# Altium PCB ECE453.PcbDoc
Units mm, origin at the board's own origin, x right, y up, seen from the top; angles counter-clockwise.
Board outline 100 x 100 mm, 2 copper layers (Top Layer, Bottom Layer); 32 components, 24 nets, 100 pads, 64 vias.
Unrouted connection lines stored in the file: 41.
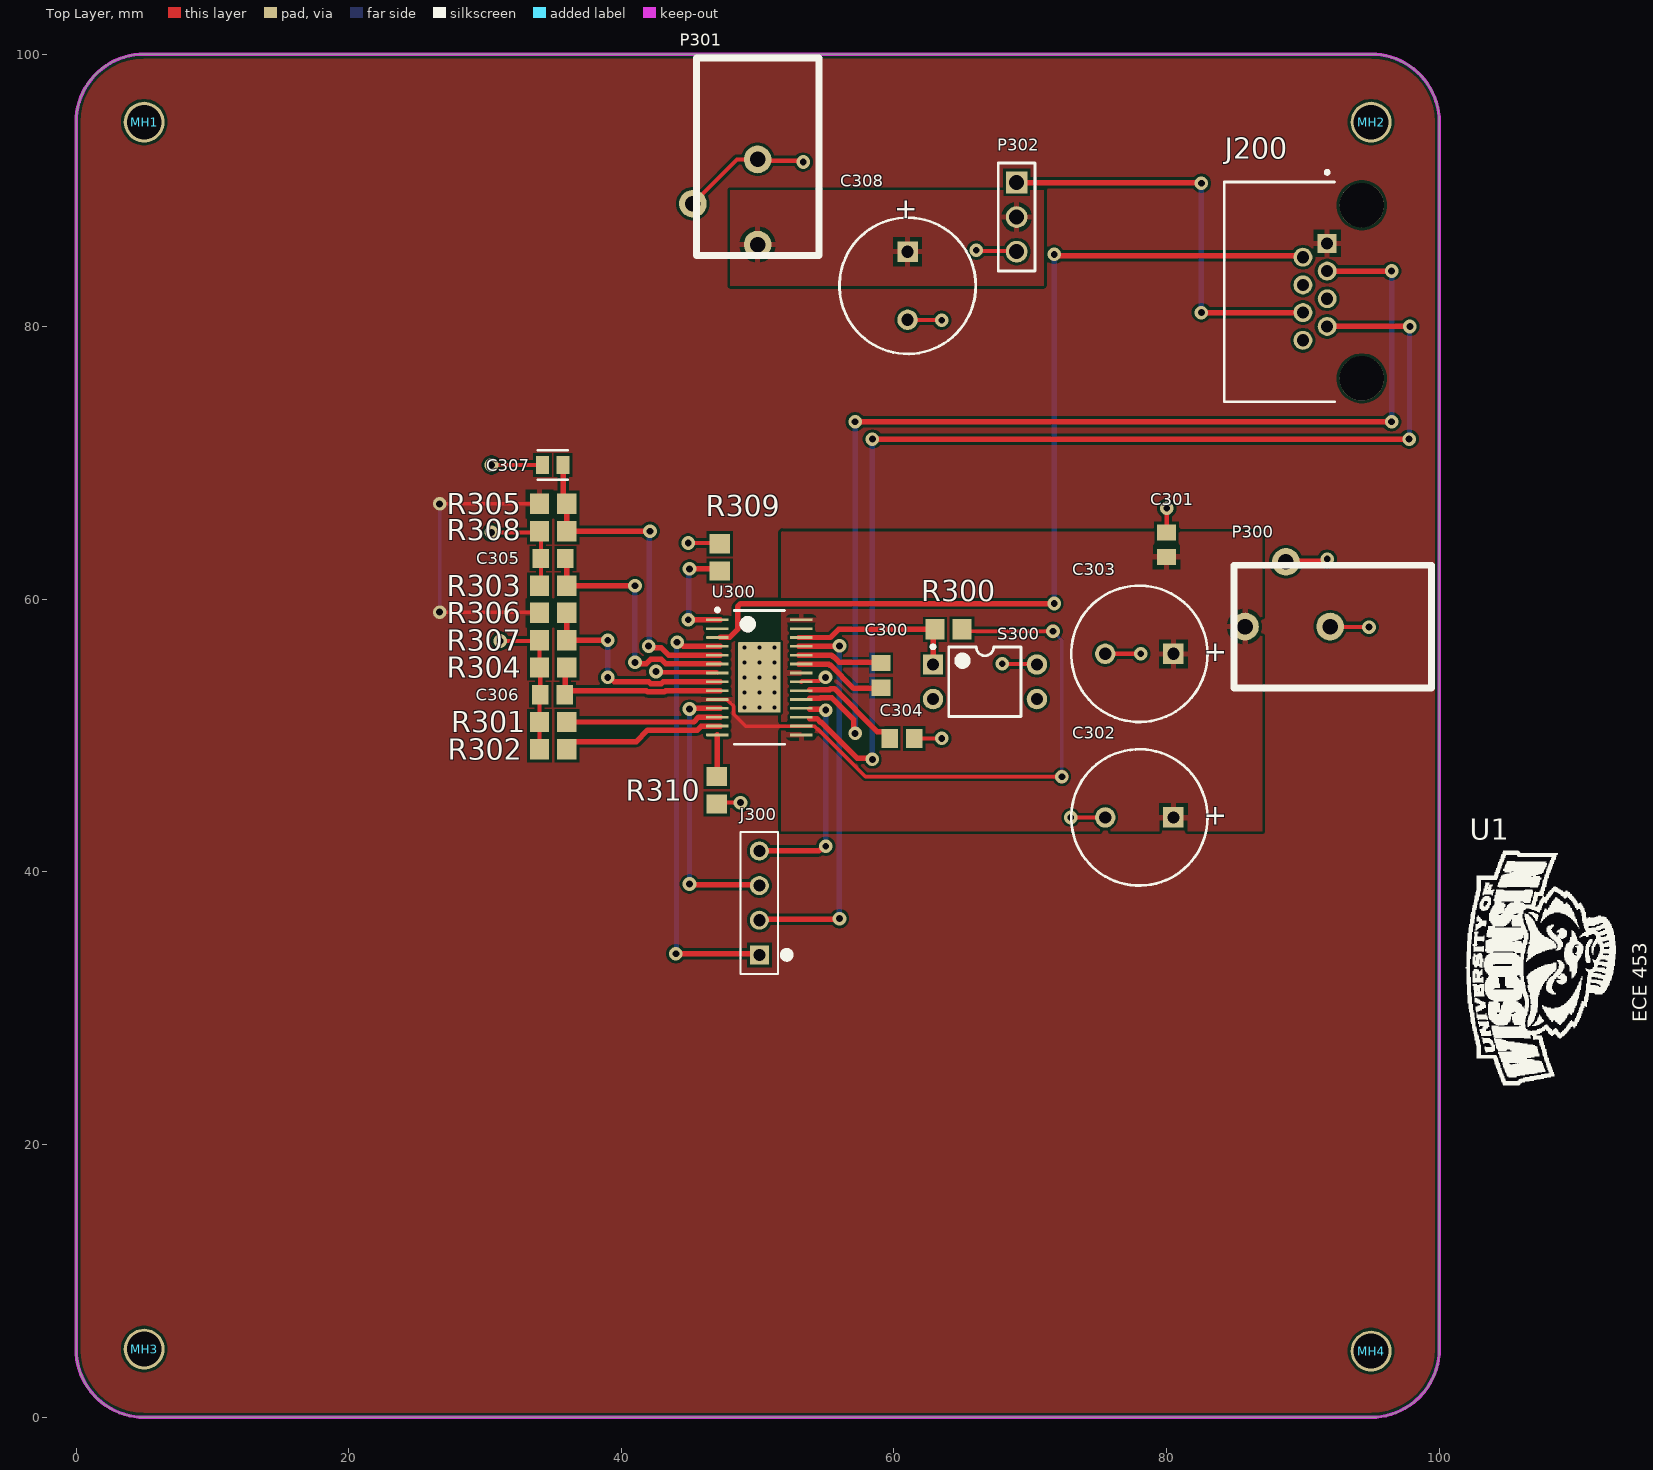
[diagram p0: Top Layer view]
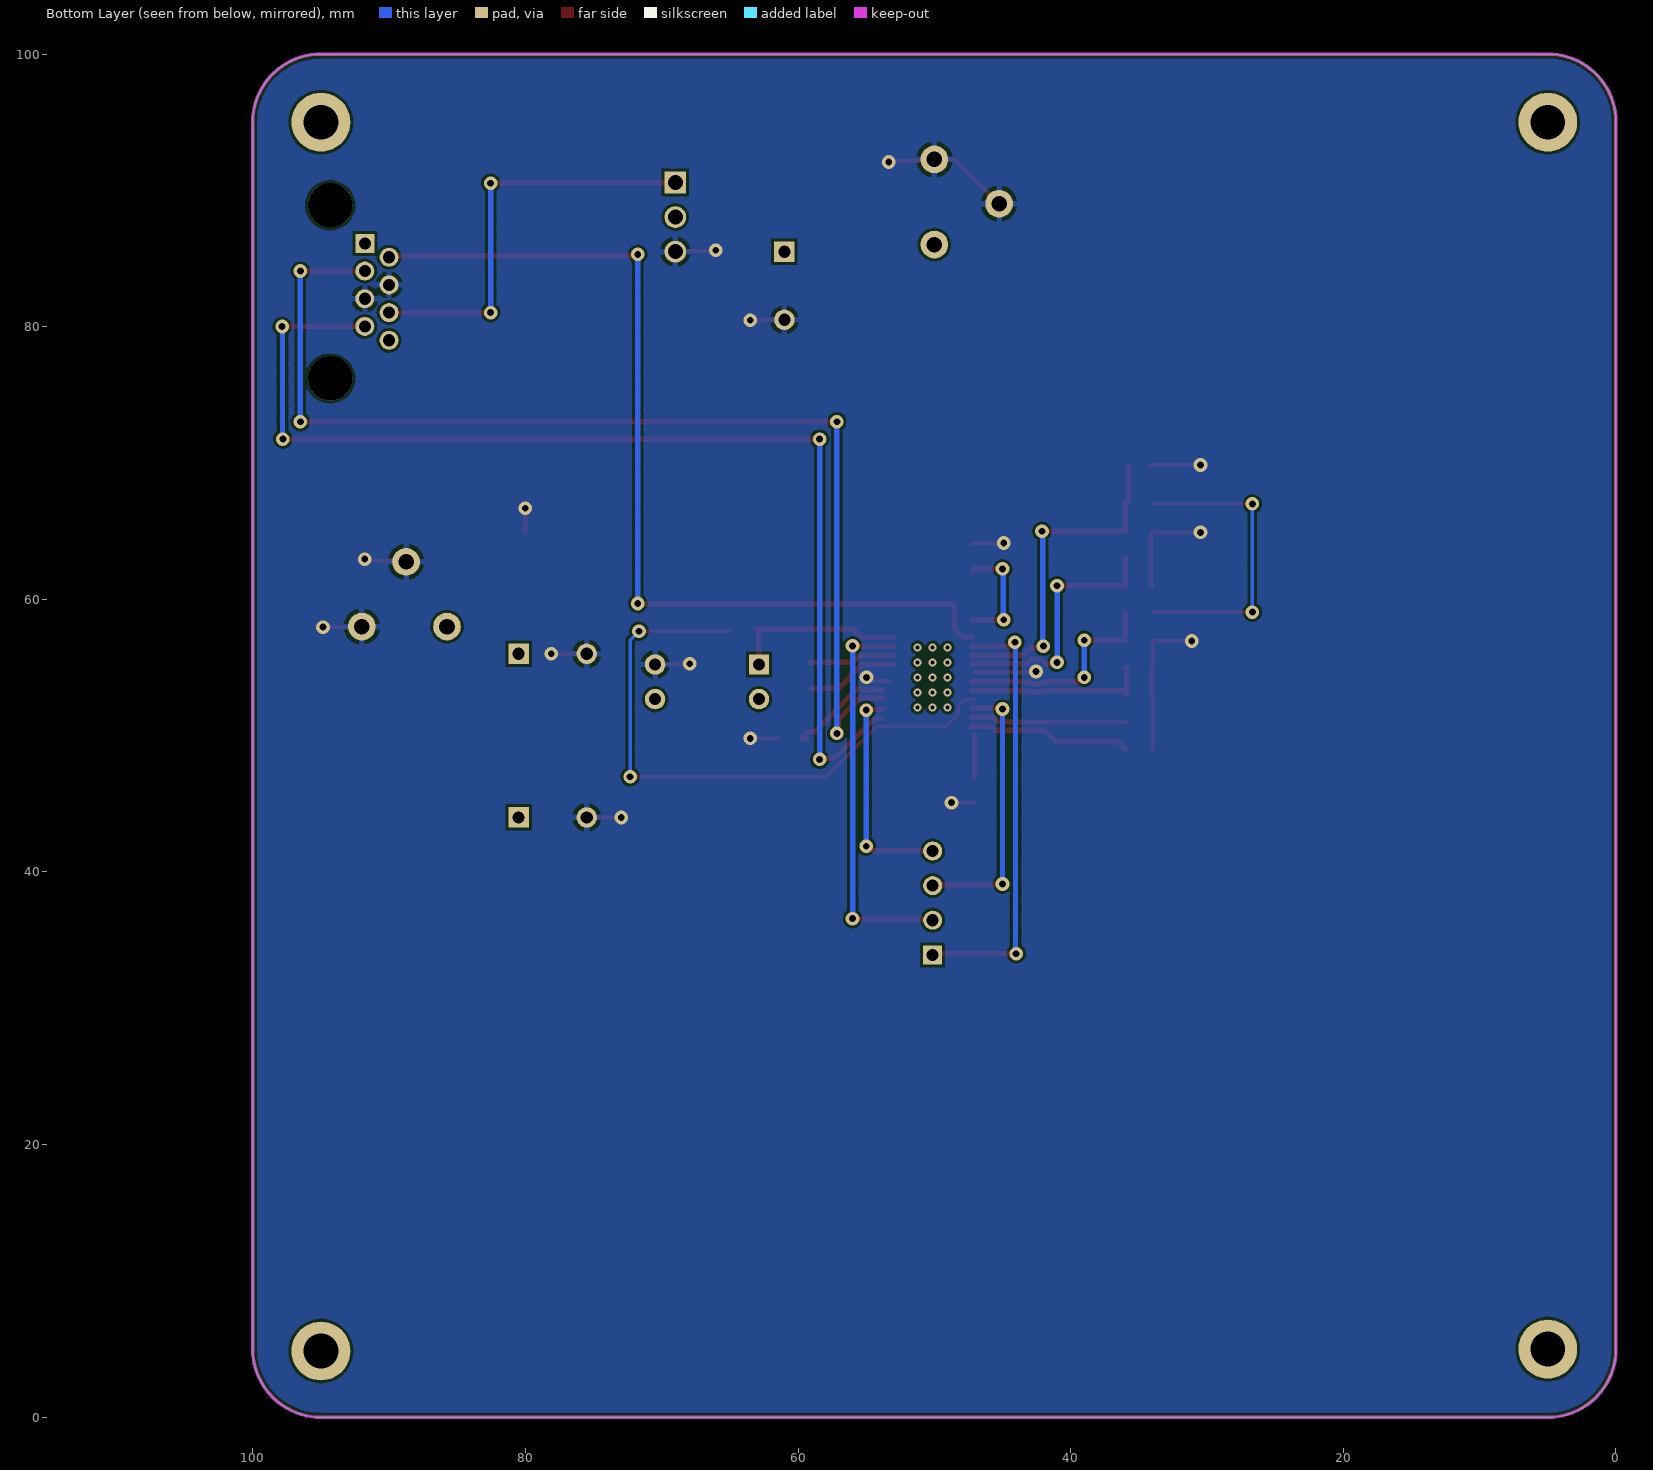
[diagram p1: Bottom Layer view, seen from below]

## Layer stack, top to bottom
Top Solder: solder mask 0.0102, Solder Resist, Dk 3.5
Top Layer: signal copper 0.0356
Dielectric1: dielectric 0.32, FR-4, Dk 4.8
Bottom Layer: signal copper 0.0356
Bottom Solder: solder mask 0.0102, Solder Resist, Dk 3.5

## Board outline
0,5 ccw(c5,5) 5,0 95,0 ccw(c95,5) 100,5 100,95 ccw(c95,95) 95,100 5,100 ccw(c5,95) 0,95

## Design rules (kind name [scope] priority, off if disabled: settings)
Clearance Polygon_Clearance [All vs InPolygon] p1: gap=0.2 ignorepadtopadclearanceinfootprint=FALSE
Clearance [All] p2: gap=0.2 ignorepadtopadclearanceinfootprint=TRUE
ComponentClearance [InComponent('U3')] p1: gap=0 collisioncheckmode=3 verticalgap=0.254 showdistances=FALSE
Height [All] p1: minheight=0 maxheight=75 prefheight=12.7
HoleSize [All] p1: absolutevalues=TRUE maxlimit=6.35 minlimit=0.3 maxpercent=80.000 minpercent=20.000
MinimumAnnularRing [All] p1: minimumring=0.15
MinimumSolderMaskSliver [All] p1: minsoldermaskwidth=0.22
NetAntennae NetAntennae_5.0V [InNet('5.0V')] p1: netantennaetolerance=0
NetAntennae NetAntennae_3.3V [InNet('3.3V')] p2: netantennaetolerance=0
PlaneClearance [All] p1: clearance=0.3
PlaneConnect [All] p1: planeconnectstyle=Relief reliefexpansion=0.3 reliefentries=4 reliefconductorwidth=0.3 reliefairgap=0.3
PolygonConnect ViaConnect [All vs IsVia] p1: connectstyle=Direct reliefconductorwidth=0.381 reliefentries=4 polygonreliefangle="90 Angle" airgapwidth=0.254
PolygonConnect [All] p2: connectstyle=Relief reliefconductorwidth=0.4 reliefentries=4 polygonreliefangle="90 Angle" airgapwidth=0.3
RoutingVias [All] p1: holewidth=0.3 width=0.6 viastyle="Through Hole" minholewidth=0.3 minwidth=0.6 maxholewidth=5 maxwidth=10
SilkToSilkClearance [All] p1: silktosilkclearance=0
SilkToSolderMaskClearance [IsPad] p1: minsilkscreentomaskgap=0 clearancetoexposedcopper=TRUE
SolderMaskExpansion [All] p1: expansion=0.102 istentingtop=FALSE
UnConnectedPin [All] p1 off:
Width [All] p1: maxlimit=10 minlimit=0.2 preferedwidth=0.6
21 further rules are at their usual default settings.

## Classes and differential pairs
component class 04_Mechanical: MH1 MH2 MH3 MH4 U1

## Components (designator, comment, footprint, x,y, rotation, side; value= is the part's Value field where it differs from the comment)
C300 "0.22uF" CAP_0805 59.055,54.424 r270 top
C301 "0.22uF" CAP_0805 80,64 r90 top
C302 "470uF" CAPPR5-10X12.5 78,44 r180 top
C303 "470uF" CAPPR5-10X12.5 78,56 r180 top
C304 "0.22uF" CAP_0805 60.59,49.781 r0 top
C305 "Cap" CAP_0805 35,63 r0 top value=1nF
C306 "Cap" CAP_0805 34.95,53 r0 top value=1nF
C307 "C0.1uF" FP-C0805C-DN-MFG 34.977,69.85 r180 top value="0.10 μF"
C308 "470uF" CAPPR5-10X12.5 61,83 r270 top
J200 "RJHSE-5080" FP-RJHSE-5080-MFG 91.905,82.556 r90 top
J300 "PH1-04-UA" CONN_PH1-04-UA_ADM 50.125,33.92 r90 top
MH1 "MHOLE_2_55MM" MHOLE_2_55MM 5,95 r0 top locked
MH2 "MHOLE_2_55MM" MHOLE_2_55MM 95,95 r0 top locked
MH3 "MHOLE_2_55MM" MHOLE_2_55MM 5,5 r0 top locked
MH4 "MHOLE_2_55MM" MHOLE_2_55MM 95,4.858 r0 top locked
P300 "PJ-102" PJ-102 85.75,58 r270 top value=CP-102AD
P301 "PJ-102" PJ-102 50,86.02 r0 top value=CP-102AD
P302 "61300311121" 61300311121 69,88.04 r270 top
R300 "10K" RES_0805 64,57.789 r0 top value=1K
R301 "10K" RES_0805 35,51 r180 top
R302 "10K" RES_0805 35,49 r180 top
R303 "49.9K" RES_0805 35,61 r0 top
R304 "49.9K" RES_0805 35,55 r0 top
R305 "10K" RES_0805 35,67 r180 top
R306 "10K" RES_0805 35,59 r180 top
R307 "10K" RES_0805 35,57 r0 top
R308 "10K" RES_0805 35,65 r0 top
R309 "1" RES_0805 47.225,63.077 r270 top value=0.1
R310 "1" RES_0805 47,46 r90 top value=0.1
S300 "Step" DIP-4 66.675,53.95 r0 top value=DIP-SW-2Pos
U1 "Bucky" WALKINGBUCKY 114.715,31.754 r90 top
U300 "DRV8811PWPR" PWP0028C_M 50.125,54.275 r0 top

## Footprints (in the part's own frame and the unit in brackets; to place one, negate y for a bottom-side part, rotate by r counter-clockwise, add the part's x,y. Pads: shape width x height; smd on the part's side, far side on the other; paste and mask are expansions set on the pad)
61300311121 [mm]
  rect 1.6x1.6 hole 1.1: 1(-2.54,0)
  round 1.6 hole 1.1: 2(0,0) 3(2.54,0)
  silkscreen extent -3.96,-1.35 3.96,1.35, body extent -3.81,-1.27 3.81,1.27, height 8.57
CAP_0805 [mm]
  rect 1.2x1.4 smd: 1(-0.9,0) 2(0.9,0)
  body extent -1.07,-0.7 1.07,0.7, height 0.7
CAPPR5-10X12.5 [mm]
  rect 1.5x1.5 hole 0.9: 1(-2.5,0)
  round 1.5 hole 0.9: 2(2.5,0)
  silkscreen extent -5,-5 5,5
CONN_PH1-04-UA_ADM [mil]
  rect 55x55 / inner round 60 / far side rect 55x55 hole 35 paste-27.5 mask+0: 1(0,0)
  round 55 / inner round 60 / far side round 55 hole 35 paste-27.5 mask+0: 2(100,0) 3(200,0) 4(300,0)
  silkscreen extent -55,-89 355,54, body extent -50,-49 350,49, height 334
DIP-4 [mm]
  rect 1.5x1.5 hole 0.9: 1(-3.81,1.27)
  round 1.5 hole 0.9: 2(-3.81,-1.27) 3(3.81,-1.27) 4(3.81,1.27)
  silkscreen extent -3.93,-2.55 2.65,2.69, body extent -3.15,-2.5 3.15,2.5, height 5.6
FP-C0805C-DN-MFG [mm]
  rect 0.95x1.35 smd paste+0 mask+0: 1(-0.75,0) 2(0.75,0)
  silkscreen extent -1.1,-1.07 1.1,1.07, body extent -1.4,-0.85 1.4,0.85, height 0.25
FP-RJHSE-5080-MFG [mm]
  rect 1.39x1.39 hole 0.89 paste-1000 mask+0: 1(3.556,0.127)
  round 1.39 hole 0.89 paste-1000 mask+0: 2(2.54,1.905) 3(1.524,0.127) 4(0.508,1.905) 5(-0.508,0.127) 6(-1.524,1.905) 7(-2.54,0.127) 8(-3.556,1.905)
  round 3.25 hole 3.25 unplated paste-1000 mask+0: ""(-6.35,-2.413) ""(6.35,-2.413)
  silkscreen extent -8.06,-0.41 8.89,7.68, body extent -8.16,-7.78 8.16,7.78, height 0.25
MHOLE_2_55MM [mm]
  round 3 / inner round 4.572 / far side round 4.318 hole 2.55: 1(0,0)
PJ-102 [mil]
  round 80 hole 45: 1(0,0) 2(0,246.05) 3(-187,118.1)
  silkscreen extent -177,-31 177,539, body extent -190,-20 180,547, height 435
PWP0028C_M [mm]
  rrect29% 1.65x0.2 smd: 1(-3.075,4.225) 2(-3.075,3.575) 3(-3.075,2.925) 4(-3.075,2.275) 5(-3.075,1.625) 6(-3.075,0.975) 7(-3.075,0.325) 8(-3.075,-0.325) 9(-3.075,-0.975) 10(-3.075,-1.625) 11(-3.075,-2.275) 12(-3.075,-2.925) 13(-3.075,-3.575) 14(-3.075,-4.225) 15(3.075,-4.225) 16(3.075,-3.575) 17(3.075,-2.925) 18(3.075,-2.275) 19(3.075,-1.625) 20(3.075,-0.975) 21(3.075,-0.325) 22(3.075,0.325) 23(3.075,0.975) 24(3.075,1.625) 25(3.075,2.275) 26(3.075,2.925) 27(3.075,3.575) 28(3.075,4.225)
  rrect3% 3.1x5.18 smd: 29(0,0)
  silkscreen extent -3.2,-4.9 1.85,5.07, body extent -2.25,-4.9 2.25,4.9, height 1.2
RES_0805 [mm]
  rect 1.4x1.5 smd: 1(-1,0) 2(1,0)
  body extent -1.07,-0.7 1.07,0.7, height 0.7
WALKINGBUCKY [mm]
  silkscreen extent -7.42,1.75 9.8,12.73

## Part data
C300 C301 C304: library part Cap_2, "Cap Ceramic 0.22uF 50V X7R 10% SMD 0805 125°C Plastic T/R", Manufacturer=KEMET, Manufacturer Part Number=C0805C224K5RACAUTO7210, Supplier Part Number 1=399-C0805C224K5RACAUTO7210CT-ND, Category="Ceramic Capacitors", Pricing 1="1=0.19000, 10=0.12800, 50=0.07680, 100=0.06490, 500=0.04438, 1000=0.03926, 2500=0.03755, 5000=0.03414 (USD)", RoHS=Yes, RoHS Compliant=Yes, Stock 1=24243, Supplier 1=Digi-Key
C302 C303 C308: library part "Cap Pol3", "CAP ALUM 470UF 20% 35V RADIAL", Case/Package=Radial, Dielectric Material=Aluminium, Leakage Current=3uA, Manufacturer=Rubycon, Manufacturer Part Number=35ZL470MEFC10X20, Max Operating Temperature=105°C, Min Operating Temperature=-40°C, Package Quantity=1000, Ripple Current=1.82A, Supplier Part Number=35ZL470MEFC10X20-ND, Tolerance=20%, Voltage=35V, Capacitance=470uF, Diameter=10mm, Height=20mm, Height - Seated (Max)=0.866inch, Impedance=23mR, Lead Diameter=0.6mm, Lead Free="Lead Free", Lead Pitch=5mm, Life (Hours)=4000Hour, Mount="Through Hole", Packaging=Bulk, Radiation Hardening=No, REACH SVHC=Unknown, Supplier=Digi-Key, Termination=Radial, Voltage Rating=35V
C305 C306: library part Cap_3, "Cap Ceramic 0.001uF 50V C0G 5% SMD 0805 125°C Punched Paper T/R", Case/Package=0805, Dielectric=C0G, Dielectric Material=Ceramic, Manufacturer=KEMET, Manufacturer Part Number=C0805C102J5GAC7210, Max Operating Temperature=125°C, Min Operating Temperature=-55°C, Supplier Part Number 1=399-C0805C102J5GAC7210CT-ND, Tolerance=5%, Voltage Rating (DC)=50V, Category="Ceramic Capacitors", ComponentLink1Description=https://datasheet.ciiva.com/11627/kem-c1003-c0g-smd-11627691.pdf?src-supplier=Avnet, ComponentLink1URL=https://datasheet.ciiva.com/11627/kem-c1003-c0g-smd-11627691.pdf?src-supplier=Avnet, ComponentLink2Description=https://datasheet.ciiva.com/26823/getdatasheetpartid-55943-26823002.pdf?src-supplier=Verical, ComponentLink2URL=https://datasheet.ciiva.com/26823/getdatasheetpartid-55943-26823002.pdf?src-supplier=Verical, Construction=Flat, Contact Plating=Tin,Matte, Depth=1.25mm, Height=0.78mm, Lead Free="Lead Free", Length=2mm, Mounting Technology="Surface Mount", Packaging="Tape and Reel", Pricing 1="1=0.11000, 10=0.07600, 50=0.04300, 100=0.03560, 500=0.02496, 1000=0.02066, 2500=0.01922, 5000=0.01759 (USD)", Radiation Hardening=No, RoHS=Yes, RoHS Compliant=Yes, Stock 1=8034, Supplier 1=Digi-Key, Termination=Wraparound
C307: library part CMP-03020-012155-1, "C0805 0.10 μF X7R 30ppm/°C 20.00% 50 V", Capacitance="0.10 μF", Manufacturer=KEMET, Manufacturer Part Number=C0805C104M5RAC7210, Package=C0805C-DN, Temperature="-55°C to +125°C", Temperature Characteristic=X7R, Temperature Coefficient=30ppm/°C, Temperature Range High=+125°C, Temperature Range Low=-55°C, Tolerance=0.2, Voltage Rating="50 V", Automotive=No, Category=Cap, ComponentLink2Description=Datasheet, ComponentLink2URL=https://content.kemet.com/datasheets/KEM_C1003_C0G_SMD.pdf, Device Class L1="Passive Components", Device Class L2=Capacitors, Device Class L3="Ceramic Capacitors", Height=0.88mm, Ipc Land Pattern Name=CAPC200125X78, Lead Free=Yes, Material=Ceramic, Octopart=https://octopart.com/c0805c104m5rac7210-kemet-3909515, RoHS=TRUE
J200: library part CMP-02366-000003-1, "CONN MOD JACK 8P8C R/A UNSHLD", Contact Resistance=20mR, Current Rating=1.5A, Manufacturer=Amphenol, Max Voltage Rating (AC)=125V, Package=CONN_MOD_JACK, Supplier Part Number=28T0105, Temperature="-55°C to +85°C", Temperature Range High=+85°C, Temperature Range Low=-55°C, Automotive=No, Category=Conn, ComponentLink1Description=https://datasheet.ciiva.com/7629/1682821-7629402.pdf?src-supplier=Element14, ComponentLink1URL=https://datasheet.ciiva.com/7629/1682821-7629402.pdf?src-supplier=Element14, ComponentLink2Description=Datasheet, ComponentLink2URL=https://cdn.amphenol-icc.com/media/wysiwyg/files/documentation/datasheet/inputoutput/io-modjack-rjhse.pdf, ComponentLink3Description=https://datasheet.ciiva.com/685/rjhse5080-685586.pdf?src-supplier=Digi-Key, ComponentLink3URL=https://datasheet.ciiva.com/685/rjhse5080-685586.pdf?src-supplier=Digi-Key, ComponentLink4Description=https://datasheet.ciiva.com/1432/1693748-1432448.pdf?src-supplier=Element14, ComponentLink4URL=https://datasheet.ciiva.com/1432/1693748-1432448.pdf?src-supplier=Element14, ComponentLink5Description=https://datasheet.ciiva.com/15171/getdatasheetpartid-643190-15171163.pdf?src-supplier=Verical, ComponentLink5URL=https://datasheet.ciiva.com/15171/getdatasheetpartid-643190-15171163.pdf?src-supplier=Verical, Conn Gender=Female, Conn Orientation="Right Angle", Connector Type=RJ45, Contact Material=Gold,Nickel, Contact Plating=Gold, Depth=14.99mm, Device Class L1=Connectors, Device Class L2="Modular / Ethernet Connectors", Device Class L3=unset, Digikey Description="CONN MOD JACK 8P8C R/A UNSHLD", Footprint Url=https://cdn.amphenol-icc.com/media/wysiwyg/files/drawing/rjhse5080.pdf?__cf_chl_jschl_tk__=e349db0bbbb6188a39347cd5e541b92fa02c9719-1587748343-0-AW7tChdeHzRPLX9gSWj7WrKaXQoY9BsmT9Ek0h-T62M9y3Rs9iypFcOtkzb-6sGYQEjFE-jcoNciDETCOZrh1rYyOesac5SvYLoLwHIsHvF4AKBlx-MXmfZUVk9OTTJLqyQq2qMm0PFRLJpNcK0nrKResqOniRSYixG2sPTmOPraH-ULJFBDL602CHqcI9KKBgTq90Jh1OL2Td4moJ99rFsJRJ1Tk_uoxGe8ublcP_ARu-uLpWcQrBcwOcHDTAwL29DAwVaqcH7ta8Ks7WMlHmVl_pILeEDwT0bE9vu5Pa5S3PtNRF1leuFkgi_FMbUxTDulc5xzbXSfng8srUIV1lWXny5nx1fZJEUa_w97yKjffzBMxiWLWVN-V7-uqAaPbyv_m-wRyw5O25OZNyJOeGU, Gender=Female, Height=0.535inch, Is Female=yes, Lead Free=Yes, Length=15.75mm, Manufacturer Part Number=RJHSE-5080, Max Current Rating=1.5A, Mounting Technology="Through Hole,Panel", Mouser Description="Modular Connectors / Ethernet Connectors R/A RJ45 NONSHIELDED 8 CONT NO LEDS", Number of Contacts=8, Number of Ports=1, Number of Positions=8, Number of Positions Loaded=8, Octopart=https://octopart.com/rjhse-5080-amphenol-45060, Orientation="Right Angle", Packaging=Rail/Tube, Pitch=1.02mm, Pricing="1=0.966, 10=0.854, 25=0.808, 50=0.777, 100=0.748, 250=0.688, 500=0.627, 1000=0.568 (USD)", Radiation Hardening=No, Reach SVHC Compliant=Unknown, RoHS=TRUE, RoHS Compliant=Yes, Stock=8640, Supplier=Newark, Termination=Solder, Voltage Rating=125V, Voltage Rating (DC)=125V
J300: "No Description Available", Mfr_Name="ADAM TECHNOLOGIES INC", Copyright="Copyright (C) 2023 Ultra Librarian. All rights reserved.", Digi-Key_Part_Number_1=2057-PH1-04-UA-ND, Manufacturer_Part_Number=PH1-04-UA, RefDes=RefDes, Type=DEV
MH1 MH2 MH3 MH4: "Mounting Holde", Manufacturer Part Number="UW MTHOLE"
P300 P301: library part "CONN JACK PWR W/SW", "CONN PWR JACK 2.1X5.5MM HIGH CUR", Color=Black, Current Rating=5A, Manufacturer="CUI Inc", Manufacturer Part Number=PJ-102AH, Operating Temperature="-25°C ~ 85°C", Supplier Part Number=CP-102AH-ND, Voltage - Rated=24VDC, Connector Type=Jack, Contact Material=Copper, Contact Material - Plating=Nickel, Gender=Male, Housing Color=Black, Housing Material=Thermoplastic, Internal Switch(s)="Single Switch, Normally Closed", Mounting Type="Through Hole, Right Angle", Number of Positions/Contacts="2 Conductors, 3 Contacts", Plug/Mating Plug Diameter="2.1mm ID, 5.5mm OD", Shielding=Unshielded, Supplier=Digi-Key, Termination=Solder
P302: library part CMP-1502-01062-2, Color=Black, Contact Resistance=20mΩ, Current Rating=3A, Max Operating Temperature=105°C, Min Operating Temperature=-40°C, Operating Supply Voltage=250V, Connector Type="Male Pin", Contact Material=Copper, Contact Mating Length=5.9944mm, Contact Plating=Gold, Gender=Male, Height=8.94mm, Lead Free="Lead Free", Lead Pitch=2.54mm, Mount="Through Hole", NexarPartId=32855521, Number of Contacts=3, Number of Pins=3, Number of Positions=3, Number of Rows=1, Orientation=Vertical, Packaging=Bulk, Pitch=2.54mm, REACH SVHC=Unknown, RoHS=Compliant, Termination=Solder, Voltage Rating=250V
R300: library part Res3_1, "Res Thick Film 0805 1K Ohm 1% 0.125W(1/8W) ±100ppm/C Pad SMD Automotive T/R", Case Code (Imperial)=0805, Case Code (Metric)=2012, Manufacturer="Stackpole Electronics", Manufacturer Part Number=RMCF0805FT1K00, Max Operating Temperature=155°C, Max Power Dissipation=125mW, Min Operating Temperature=-55°C, Resistor Type="Thick Film", Supplier Part Number 1=RMCF0805FT1K00CT-ND, Temperature Coefficient=100ppm/°C, Tolerance=1%, Case/Package=0805, Category="Chip SMD Resistors", ComponentLink1Description=https://datasheet.ciiva.com/15193/getdatasheetpartid-360136-15193546.pdf?src-supplier=Verical, ComponentLink1URL=https://datasheet.ciiva.com/15193/getdatasheetpartid-360136-15193546.pdf?src-supplier=Verical, Construction=Rectangular, Contact Plating=Tin,Matte, Depth=1.25mm, Features="Automotive AEC-Q200", Height=0.026inch, Lead Free="Lead Free", Length=2mm, Military Standard=Not, Mounting Technology="Surface Mount", Number of Terminations=2, Packaging="Tape and Reel", Power Rating=125mW, Pricing 1="1=0.10000, 10=0.02400, 100=0.00970, 1000=0.00437, 2500=0.00379 (USD)", Radiation Hardening=No, RoHS=Yes, RoHS Compliant=Yes, Series=RMCF, Stock 1=2773085, Supplier 1=Digi-Key, Width=0.049inch
R301 R302 R305 R306 R307 R308: library part Res3, "Res Thick Film 0805 10K Ohm 1% 0.125W ±100ppm/°C Molded SMD Paper T/R", Case Code (Imperial)=0805, Case Code (Metric)=2012, Manufacturer="Stackpole Electronics", Manufacturer Part Number=RMCF0805FT10K0, Max Operating Temperature=155°C, Max Power Dissipation=125mW, Min Operating Temperature=-55°C, Resistor Type="Thick Film", Supplier Part Number 1=RMCF0805FT10K0CT-ND, Temperature Coefficient=100ppm/°C, Tolerance=1%, Case/Package=0805, Category="Chip SMD Resistors", ComponentLink1Description=https://datasheet.ciiva.com/15193/getdatasheetpartid-362046-15193525.pdf?src-supplier=Verical, ComponentLink1URL=https://datasheet.ciiva.com/15193/getdatasheetpartid-362046-15193525.pdf?src-supplier=Verical, Construction=Rectangular, Contact Plating=Tin,Matte, Depth=1.25mm, Features="Automotive AEC-Q200", Height=0.026inch, Lead Free="Lead Free", Length=2mm, Military Standard=Not, Mounting Technology="Surface Mount", Number of Terminations=2, Packaging="Tape and Reel", Power Rating=125mW, Pricing 1="1=0.10000, 10=0.02400, 100=0.00970, 1000=0.00437, 2500=0.00379 (USD)", Radiation Hardening=No, RoHS=Yes, RoHS Compliant=Yes, Series=RMCF, Stock 1=3732463, Supplier 1=Digi-Key, Width=0.049inch
R303 R304: library part Res3_3, "Res Thick Film 0805 49.9K Ohm 1% 0.125W ±100ppm/°C Molded SMD Paper T/R", Case Code (Imperial)=0805, Case Code (Metric)=2012, Manufacturer="Stackpole Electronics", Manufacturer Part Number=RMCF0805FT49K9, Max Operating Temperature=155°C, Max Power Dissipation=125mW, Min Operating Temperature=-55°C, Package Quantity=1, Resistor Type="Thick Film", Supplier Part Number 1=RMCF0805FT49K9CT-ND, Temperature Coefficient=100ppm/°C, Tolerance=1%, Case/Package=0805, Category="Chip SMD Resistors", ComponentLink1Description=http://components.arrow.com/part/dataview/43746233S7171820N1174?src-supplier=Arrow+Electronics, ComponentLink1URL=http://components.arrow.com/part/dataview/43746233S7171820N1174?src-supplier=Arrow+Electronics, ComponentLink2Description=https://www.seielect.com/Catalog/SEI-RMCF_RMCP.pdf?src-supplier=Digi-Key, ComponentLink2URL=https://www.seielect.com/Catalog/SEI-RMCF_RMCP.pdf?src-supplier=Digi-Key, ComponentLink3Description=https://www.seielect.com/catalog/SEI-Packaging.pdf?src-supplier=Digi-Key, ComponentLink3URL=https://www.seielect.com/catalog/SEI-Packaging.pdf?src-supplier=Digi-Key, ComponentLink4Description=https://www.seielect.com/catalog/SEI-RMCF_RMCP.pdf?src-supplier=Avnet, ComponentLink4URL=https://www.seielect.com/catalog/SEI-RMCF_RMCP.pdf?src-supplier=Avnet, ComponentLink5Description=http://www.seielect.com/Catalog/SEI-RMC.pdf?src-supplier=Future+Electronics, ComponentLink5URL=http://www.seielect.com/Catalog/SEI-RMC.pdf?src-supplier=Future+Electronics, ComponentLink6Description=https://www.verical.com/server-webapp/html/getDatasheet?partID=362599&src-supplier=Verical, ComponentLink6URL=https://www.verical.com/server-webapp/html/getDatasheet?partID=362599&src-supplier=Verical, Construction=Rectangular, Contact Plating=Tin,Matte, Depth=1.25mm, Features="Automotive AEC-Q200", Height=0.026inch, Lead Free="Lead Free", Length=2mm, Military Standard=Not, Mounting Technology="Surface Mount", Number of Terminations=2, Packaging="Tape and Reel", Power Rating=125mW, Pricing 1="1=0.10000, 10=0.02400, 100=0.00970, 1000=0.00437, 2500=0.00379 (USD)", Radiation Hardening=No, RoHS=Yes, RoHS Compliant=Yes, Series=RMCF, Stock 1=593081, Supplier 1=Digi-Key, Width=0.049inch
R309 R310: library part Res3_2, "Res 0.1 Ohm 1% 1W 1206", Manufacturer=Cyntec, Manufacturer Part Number=SCRR1206S1-R100F, Supplier Part Number 1=2037-SCRR1206S1-R100FCT-ND, Category="Chip SMD Resistors", Pricing 1="1=0.61000, 10=0.45100, 25=0.36600, 50=0.31820, 100=0.26250, 250=0.22800, 500=0.18558, 1000=0.14720 (USD)", RoHS=Yes, Stock 1=10585, Supplier 1=Digi-Key
S300: library part "SW DIP-2", "Switch DIP OFF ON SPST 2 Raised Slide 0.025A 24VDC PC Pins 2.54mm Thru-Hole Tube", Manufacturer="CUI Devices", Manufacturer Part Number=DS01-254-L-02BE, Supplier Part Number 1=2223-DS01-254-L-02BE-ND, Category="DIP Switches", Pricing 1="1=0.5, 10=0.483, 25=0.4648, 100=0.4022, 250=0.36648, 500=0.33966, 1000=0.30391, 2500=0.28782, 5000=0.26637 (USD)", RoHS=Yes, Stock 1=12017, Supplier 1=Digi-Key
U1: "Bucky Badger Image", Manufacturer Part Number="UW Bucky"
U300: library part CMP-1556-00003-2, "1.9 A Bipolar Stepper Motor Driver with On-Chip 1 / 8 Microstepping Indexer (Step / Dir Ctrl), -40 to 85 degC, 28-pin HTSSOP (PWP), Green (RoHS & no Sb/Br)", Package Reference=PWP0028C, Peak Output Current(A)=1.9, Code_JEDEC=MO-153, ComponentLink1Description="Manufacturer URL", ComponentLink1URL=http://www.ti.com/, ComponentLink2Description=Datasheet, ComponentLink2URL=http://www.ti.com/general/docs/lit/getliterature.tsp?genericPartNumber=DRV8811&fileType=pdf, ComponentLink3Description="Package Specification", ComponentLink3URL=http://www.ti.com/litv/pdf/mpds373, DatasheetVersion=SLVS865G, Eco-Plan="Green (RoHS & no Sb/Br)", Mounting Technology="Surface Mount", PackageDescription="28-Pin Plastic Small Outline, Body 9.70 x 4.40 mm, Pitch 0.65 mm", PackageVersion="4073225-6/I, 05/2011", PartNumber=DRV8811PWPR, Thermal Shutdown=TRUE

## Via types
v1: diameter 1, hole 0.5, Top Layer to Bottom Layer, 49 vias
v2: diameter 0.6, hole 0.3, Top Layer to Bottom Layer, 15 vias

## Nets (pads, with @x,y where several pads share a name; then routed paths per layer and width w, separated by ;. In a path a pad name is that pad's centre, name@x,y a point inside that pad or via, vN(x,y) a via of type N, cw(c..) or ccw(c..) an arc to the next point about the centre after c; other vN are vias at no path point)
3.3V: J200.1 R300.2 R305.2 R306.2 U300.10 U300.16 | length 68.2
  Top Layer w0.254: v1(26.67,59.06) 33.94,59.06 R306.2 ; v1(26.67,67) R305.2 ; U300.10 47.721,52.65 47.944,52.427 47.993,52.427 48.248,52.172 48.248,51.577 49.125,50.7 U300.16 53.227,50.673 54.184,50.673 54.409,50.448 54.453,50.448 57.911,46.99 v1(72.315,46.99) ; R300.2 65.135,57.654 v1(71.663,57.654)
  Bottom Layer w0.254: v1(26.67,59.06) v1(26.67,67) ; v1(71.663,57.654) 72.315,57.002 v1(72.315,46.99)
5V: C308.1 P301.1 P302.2
12V: C301.1 C302.1 C303.1 P300.1 U300.15 U300.22 U300.28
AOUT1: J300.1 U300.4 | length 32.3
  Top Layer w0.4: v1(44,34) 50.045,34 J300.1 ; v1(44.092,56.854) 44.255,56.854 44.558,56.55 U300.4@47.25,56.55
  Bottom Layer w0.4: v1(44,34) 44.046,34.046 44.046,56.807 v1(44.092,56.854)
AOUT2: J300.2 U300.25 | length 28.9
  Top Layer w0.4: J300.2 50.184,36.519 55.941,36.519 v1(56,36.578) ; U300.25@53,56.55 55.967,56.55 v1(56,56.583)
  Bottom Layer w0.4: v1(56,36.578) v1(56,56.583)
BOUT1: J300.3 U300.11 | length 20.3
  Top Layer w0.4: v1(45,39.118) 45.059,39.059 50.066,39.059 J300.3 ; v1(45,51.95) 45.05,52 U300.11@47.25,52
  Bottom Layer w0.4: v1(45,39.118) v1(45,51.95)
BOUT2: J300.4 U300.18 | length 16.2
  Top Layer w0.4: J300.4 54.491,41.54 54.838,41.887 v1(55,41.887) ; U300.18@53.825,51.937 54.937,51.937 v1(55,51.875)
  Bottom Layer w0.4: v1(55,41.887) v1(55,51.875)
DIR: J200.2 U300.3 | length 70.5
  Top Layer w0.4: U300.3@47.25,57.2 47.275,57.225 47.961,57.225 48.525,57.789 48.525,59.456 48.76,59.69 v1(71.755,59.69) ; v1(71.755,85.3) 71.857,85.198 89.898,85.198 J200.2
  Bottom Layer w0.4: v1(71.755,59.69) v1(71.755,85.3)
GND: C301.2 C302.2 C303.2 C304.2 C305.1 C306.1 C307.2 C308.2 J200.4 J200.5 P300.2 P300.3 P301.2 P301.3 P302.3 R301.2 R302.2 R303.1 R304.1 R307.1 R308.1 R309.1 R310.1 S300.4 U300.7 U300.21 | length 65.5
  Top Layer w0.3: v1(30.48,64.908) 33.908,64.908 R308.1 34.1,64.9 C305.1 34.1,61.1 R303.1 R303.1@34,60.95 ; v1(30.48,69.85) C307.2 ; v1(31.115,56.946) 33.946,56.946 R307.1 R304.1 34.05,54.95 C306.1 34,52.95 R301.2 R302.2 ; v1(42.545,54.705) 42.6,54.65 47,54.65 U300.7 ; v1(44.908,64.135) 47.167,64.135 R309.1 ; P301.3 48.5,92.269 P301.2 50.097,92.172 53.243,92.172 v1(53.34,92.075) ; R310.1 47.085,45.085 v1(48.742,45.085) ; U300.21 53.25,54 54.51,54 54.785,54.275 v1(54.975,54.275) ; C308.2 61.014,80.486 63.486,80.486 v1(63.5,80.472) ; C304.2 61.505,49.796 v1(63.5,49.796) ; v1(66.04,85.611) 66.095,85.555 68.945,85.555 P302.3 ; v1(67.945,55.276) 67.973,55.248 70.457,55.248 S300.4 ; v1(72.967,44) C302.2 ; C303.2 75.505,56.005 78.1,56.005 v1(78.105,56.01) ; C301.2 80.01,64.91 v1(80.01,66.675) ; P300.3 88.85,62.85 91.678,62.85 v1(91.778,62.95) ; P300.2 92.021,57.979 94.83,57.979 v1(94.85,57.959)
ISENA: R309.2 U300.1 | length 8.4
  Top Layer w0.4: v1(44.908,58.5) U300.1@47.25,58.5 ; v1(45,62.23) 47.072,62.23 R309.2
  Bottom Layer w0.4: v1(44.908,58.5) 44.954,58.546 44.954,62.184 v1(45,62.23)
ISENB: R310.2 U300.14 | length 3.1
  Top Layer w0.4: R310.2 47.05,47.05 U300.14
NetC300_1: C300.1 U300.24 | length 6.3
  Top Layer w0.4: U300.24@53,55.9 55.411,55.9 55.536,55.775 55.596,55.775 55.997,55.374 C300.1@59.055,55.374
NetC300_2: C300.2 U300.23 | length 6.8
  Top Layer w0.4: U300.23@53,55.25 55.212,55.25 55.287,55.175 55.348,55.175 57.048,53.474 C300.2@59.055,53.474
NetC304_1: C304.1 U300.20 | length 7.5
  Top Layer w0.4: U300.20@53.825,53.375 55.281,53.375 55.35,53.444 55.621,53.444 58.785,50.281 59.29,50.281 59.69,49.881 C304.1 ; C304.1@59.375,49.781 C304.1@59.375,49.831
NetC305_2: C305.2 R303.2 U300.6 | length 19.2
  Top Layer w0.4: C305.2@35.95,63 36,62.95 R303.2 v1(41,61) ; v1(41,55.375) 41.1,55.275 41.842,55.275 42.172,55.605 42.918,55.605 43.248,55.275 U300.6@47.225,55.275
  Bottom Layer w0.4: v1(41,55.375) v1(41,61)
NetC306_2: C306.2 R304.2 U300.9 | length 13.6
  Top Layer w0.4: R304.2 35.9,54.9 35.9,53 36.2,53.3 41.828,53.3 41.924,53.205 43.166,53.205 43.262,53.3 U300.9@47.25,53.3
NetC307_1: C307.1 R305.1 R308.2 U300.5 | length 25.1
  Top Layer w0.4: C307.1 35.727,67.273 R305.1 R308.2 v1(42.106,65) ; v1(42,56.565) 42.115,56.45 42.921,56.45 43.471,55.9 U300.5@47.25,55.9
  Bottom Layer w0.4: v1(42,56.565) 42.053,56.618 42.053,64.947 v1(42.106,65)
NetR300_1: R300.1 S300.1 U300.26 | length 12.9
  Top Layer w0.4: U300.26@53,57.2 55.344,57.2 55.933,57.789 R300.1 62.865,57.654 S300.1
NetR301_1: R301.1 U300.12 | length 11.4
  Top Layer w0.4: R301.1 45.323,51 45.673,51.35 U300.12@47.25,51.35
NetR302_1: R302.1 U300.13 | length 12
  Top Layer w0.4: R302.1 36,49.05 36.5,49.55 41.088,49.55 41.938,50.4 45.571,50.4 45.871,50.7 U300.13@47.25,50.7
NetR306_1: R306.1 R307.2 U300.8 | length 16.2
  Top Layer w0.4: R306.1 R307.2 v1(39,57) ; v1(39,54.275) 39.162,54.275 39.487,53.95 42.027,53.95 42.172,53.805 42.918,53.805 43.063,53.95 U300.8@47.25,53.95
  Bottom Layer w0.4: v1(39,54.275) v1(39,57)
RESETn: J200.7 U300.17 | length 83
  Top Layer w0.4: U300.17@53.825,51.25 54.352,51.25 54.627,50.975 54.671,50.975 57.32,48.326 58.354,48.326 v1(58.42,48.26) ; v1(58.42,71.755) v1(97.79,71.755) ; J200.7 v1(97.843,80.016)
  Bottom Layer w0.4: v1(58.42,48.26) v1(58.42,71.755) ; v1(97.79,71.755) 97.817,71.782 97.817,79.989 v1(97.843,80.016)
SERVO_CTRL: J200.6 P302.1 | length 30.5
  Top Layer w0.4: P302.1 69.028,90.552 82.522,90.552 v1(82.55,90.523) ; v1(82.55,81.032) J200.6
  Bottom Layer w0.4: v1(82.55,81.032) v1(82.55,90.523)
STEP: J200.3 U300.19 | length 82.9
  Top Layer w0.4: 53.825,52.75 54.602,52.75 54.627,52.775 55.442,52.775 57.035,51.182 57.035,50.28 v1(57.15,50.165) ; v1(57.15,73.025) v1(96.504,73.025) ; J200.3 v1(96.504,84.08)
  Bottom Layer w0.4: v1(57.15,50.165) v1(57.15,73.025) ; v1(96.504,73.025) v1(96.504,84.08)
pads on no net: J200. J200.8 MH1.1 MH2.1 MH3.1 MH4.1 S300.2 S300.3 U300.2 U300.27 U300.29
copper on no net:
  other v2: 49.025,52.075 50.125,52.075 51.225,52.075 49.025,53.175 50.125,53.175 51.225,53.175 49.025,54.275 50.125,54.275 51.225,54.275 49.025,55.375 50.125,55.375 51.225,55.375 49.025,56.475 50.125,56.475 51.225,56.475

## Polygon pours and split planes (outlines as drawn)
GND on Bottom Layer "B_GND" (solid, remove dead copper, pour order 5): 0,100 -0.5,99.5 -0.5,0 100,0 100,100
GND on Bottom Layer "B_GND" (hatched 45Degree grid 1 track 0.2, remove dead copper, pour order 9): 100,100 0,100 0,0 100,0
3.3V on Top Layer "T_3.3V" (solid, remove dead copper, pour order 8): 100,100 0,100 0,0 100,0
12V on Top Layer "T_12V" (solid, remove dead copper, pour order 7): 51.725,65 51.725,43 53,43 87,43 87,64.95
5V on Top Layer "T_5V" (solid, remove dead copper, pour order 6): 48,90 71,90 71,83 48,83

## Keep-outs
Keep-Out Layer:
  the board outline again, w0.254

## Silkscreen, mask and mechanical layers (free items; w line width, h text height)
Mechanical 2:
  lines w0.254: 5,0 cw(c5,5) 0,5 0,95 cw(c5,95) 5,100 95,100 cw(c95,95) 100,95 100,5 cw(c95,5) 95,0 5,0 ; 5,0 5,0

## Text inside footprints (layer, text, board x,y; h text height)
C302: Top Overlay "+" at 84.465,44.75 h1.5 r180
C303: Top Overlay "+" at 84.465,56.75 h1.5 r180
C308: Top Overlay "+" at 60.25,89.465 h1.5 r270
U1: Top Overlay "ECE 453" at 115.223,28.96 h1.02 r90